# Altium PCB OH02B10-FF-Panel.PcbDoc
Units mm, origin at the board's own origin, x right, y up, seen from the top; angles counter-clockwise.
Board outline 25 x 25 mm, 4 copper layers (L1, L2, L3, L4); 10 components, 0 nets, 10 pads, 0 vias.
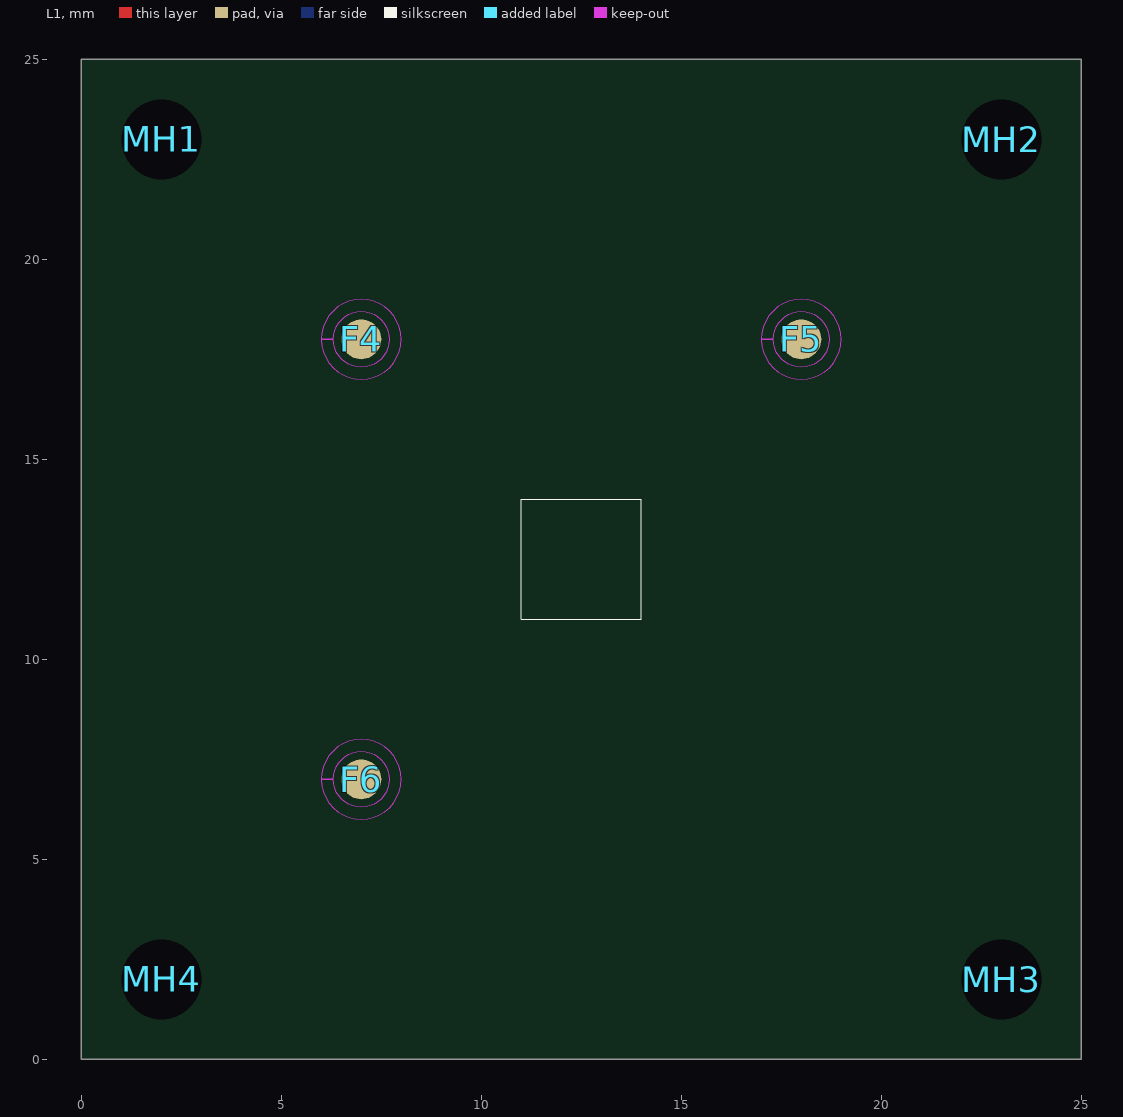
[diagram p0: L1 view]
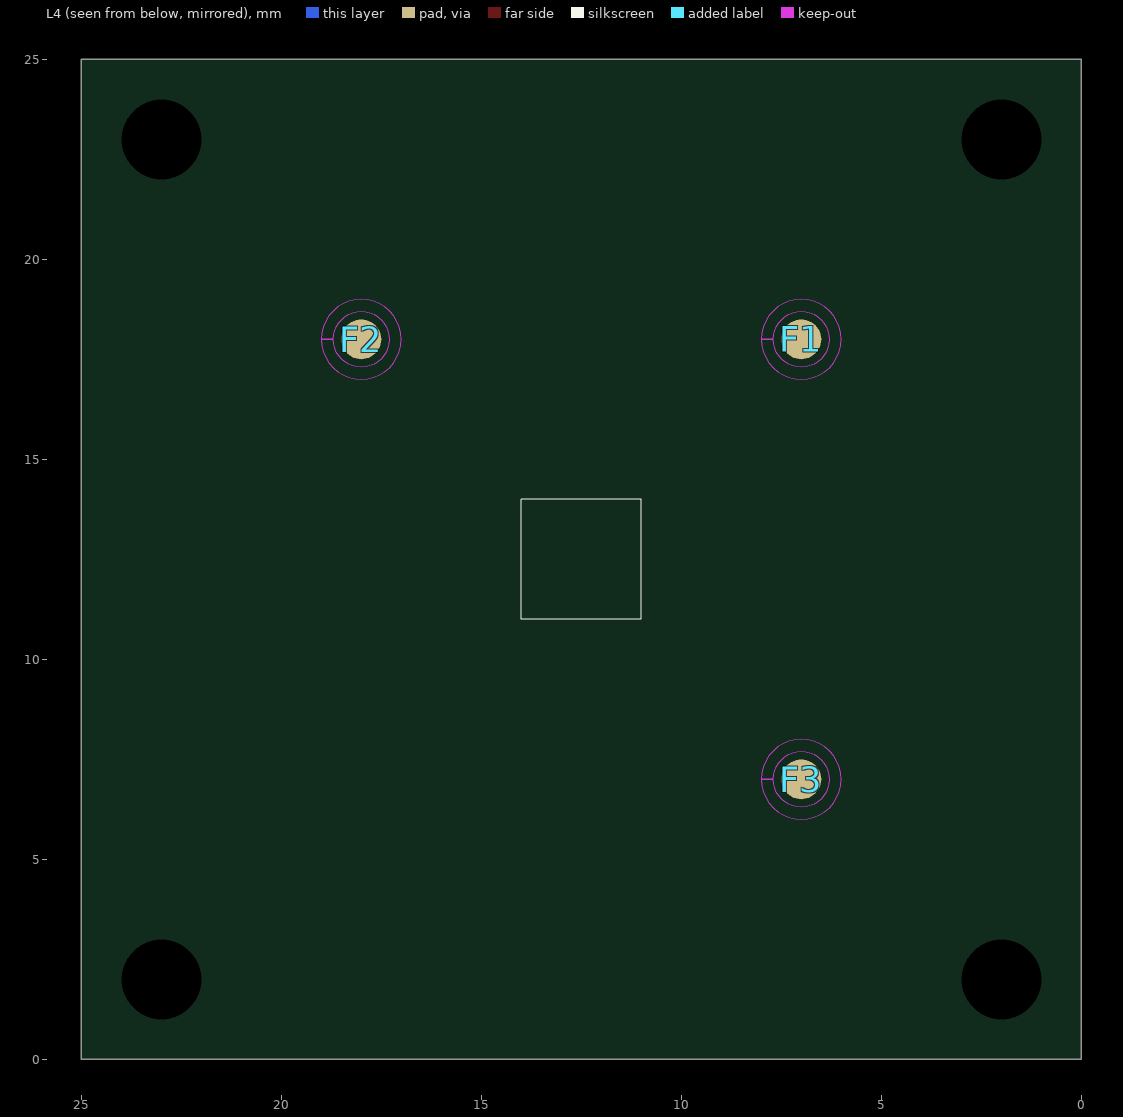
[diagram p1: L4 view, seen from below]

## Layer stack, top to bottom
Top Solder: solder mask 0.0102, Solder Resist, Dk 3.5
L1: signal copper 0.0356
(Inserted) Dielectric 3: prepreg 0.32, FR-4, Dk 4.8
L2: signal copper 0.0356
(Inserted) Dielectric 2: prepreg 0.32, FR-4, Dk 4.8
L3: signal copper 0.0356
Dielectric 1: dielectric 0.32, FR-4, Dk 4.8
L4: signal copper 0.0356
Bottom Solder: solder mask 0.0102, Solder Resist, Dk 3.5

## Board outline
0,0 0,25 25,25 25,0

## Design rules (kind name [scope] priority, off if disabled: settings)
Clearance [All] p1: gap=0.254 ignorepadtopadclearanceinfootprint=FALSE except(0: Arc-Hole Track-Hole SMDPad-Hole THPad-Hole Via-Hole Fill-Hole Poly-Hole Region-Hole Text-Hole)
PolygonConnect [All] p1: connectstyle=Relief reliefconductorwidth=0.254 reliefentries=4 polygonreliefangle="90 Angle" airgapwidth=0.254
RoutingVias [All] p1: holewidth=0.711 width=1.27 viastyle="Through Hole" minholewidth=0.711 minwidth=1.27 maxholewidth=0.711 maxwidth=1.27
SolderMaskExpansion [All] p1: expansion=0.102 istentingtop=FALSE
Width [All] p1: maxlimit=0.254 minlimit=0.254 preferedwidth=0.254
30 further rules are at their usual default settings.

## Components (designator, comment, footprint, x,y, rotation, side; value= is the part's Value field where it differs from the comment)
F1 "Comment" FIDUCIAL-1MM 7,18 r0 bottom
F2 "Comment" FIDUCIAL-1MM 18,18 r0 bottom
F3 "Comment" FIDUCIAL-1MM 7,7 r0 bottom
F4 "Comment" FIDUCIAL-1MM 7,18 r180 top
F5 "Comment" FIDUCIAL-1MM 18,18 r180 top
F6 "Comment" FIDUCIAL-1MM 7,7 r180 top
MH1 "Comment" MH2.0P2.0-NPTH 2,23 r0 top
MH2 "Comment" MH2.0P2.0-NPTH 23,23 r0 top
MH3 "Comment" MH2.0P2.0-NPTH 23,2 r0 top
MH4 "Comment" MH2.0P2.0-NPTH 2,2 r0 top

## Footprints (in the part's own frame and the unit in brackets; to place one, negate y for a bottom-side part, rotate by r counter-clockwise, add the part's x,y. Pads: shape width x height; smd on the part's side, far side on the other; paste and mask are expansions set on the pad)
FIDUCIAL-1MM [mm] "Placement fiducial, 1mm pad, 2mm SM clearance"
  round 1 smd paste-1 mask+0.5: 0(0,0)
  L1 keep-out region: 0.7,0 1,0 0.924,0.383 0.707,0.707 0.383,0.924 0,1 0,1 -0.383,0.924 -0.707,0.707 -0.924,0.383 -1,0 -1,0 -0.924,-0.383 -0.707,-0.707 -0.383,-0.924 0,-1 0,-1 0.383,-0.924 0.707,-0.707 0.924,-0.383 1,0 1,0 0.7,0 0.647,-0.268 0.495,-0.495 0.268,-0.647 0,-0.7 0,-0.7 -0.268,-0.647 -0.495,-0.495 -0.647,-0.268 -0.7,0 -0.7,0 -0.647,0.268 -0.495,0.495 -0.268,0.647 0,0.7 0,0.7 0.268,0.647 0.495,0.495 0.647,0.268 0.7,0
MH2.0P2.0-NPTH [mm] "Hole, 2.0mm hole dia, non-plated, 2.0mm clearance"
  round 1 hole 2 unplated mask+0.75: 1(0,0)

## Part data
F1 F2 F3 F4 F5 F6 MH1 MH2 MH3 MH4: library part 125-00095

## Nets (pads, with @x,y where several pads share a name; then routed paths per layer and width w, separated by ;. In a path a pad name is that pad's centre, name@x,y a point inside that pad or via, vN(x,y) a via of type N, cw(c..) or ccw(c..) an arc to the next point about the centre after c; other vN are vias at no path point)
pads on no net: F1.0 F2.0 F3.0 F4.0 F5.0 F6.0 MH1.1 MH2.1 MH3.1 MH4.1

## Silkscreen, mask and mechanical layers (free items; w line width, h text height)
Top Overlay:
  lines w0.025: 11,11 14,11 14,14 11,14 11,11
Bottom Overlay:
  lines w0.025: 11,11 11,14 14,14 14,11 11,11
Board Outline:
  the board outline again, w0.1

## Panel: embedded boards
"OH02B10-FF-Concept.PcbDoc" at 11,11, 1 rows x 1 columns, spacing 13 x 13, rotation 0